# EAGLE board fabTinyStar-013 (EAGLE 6.5.0)
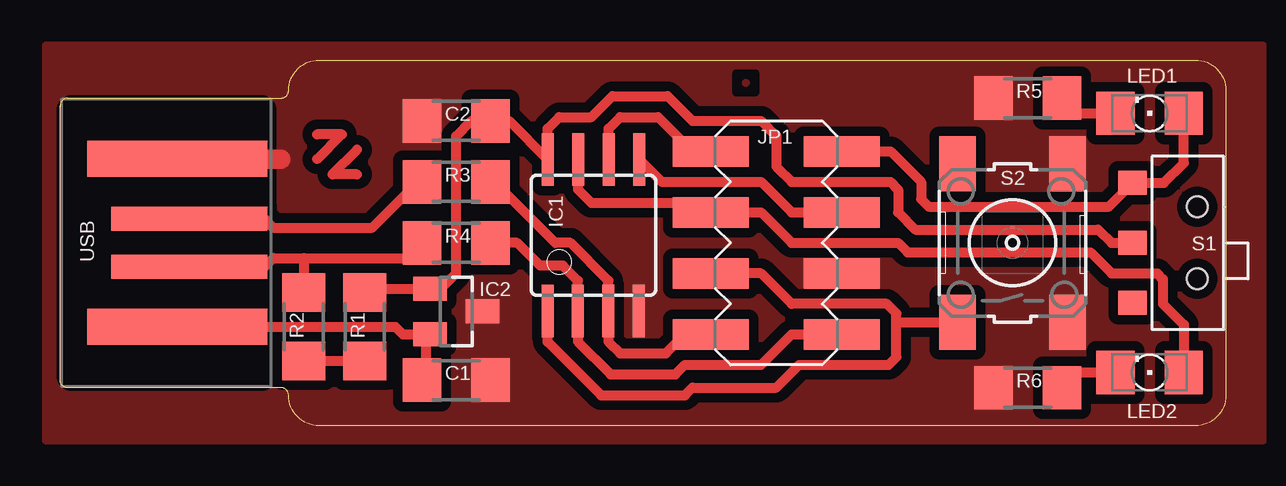
[diagram p0: board, top side]
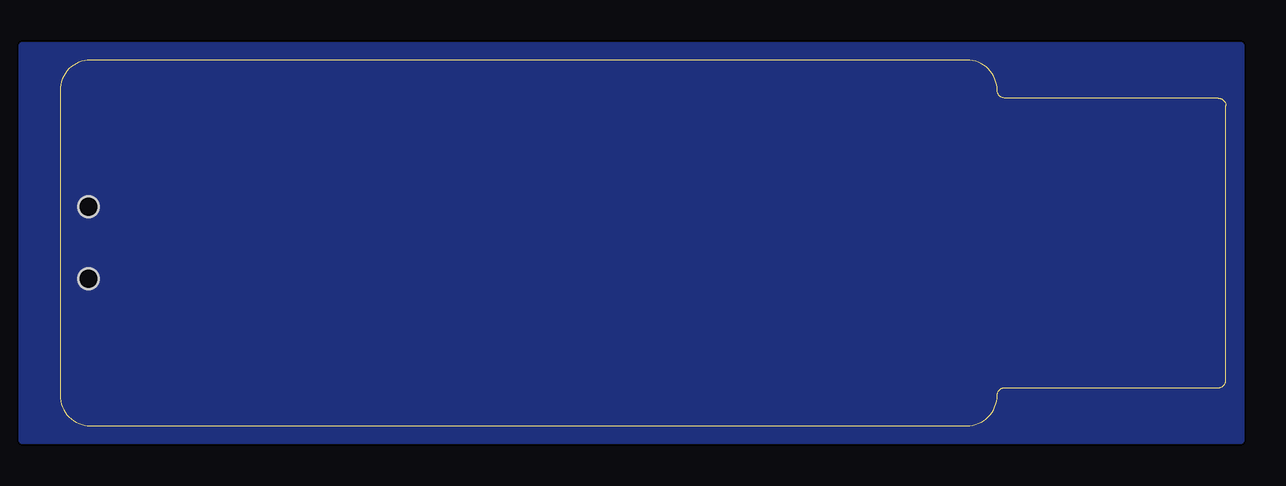
[diagram p1: board, bottom side, seen from below]

Size 48.58 x 15.24 mm. Coordinates in mm from the lower left corner, seen from the top.
Outline: 9.21,13.65 arc90 9.53,13.97 arc-90 10.79,15.24 47.31,15.24 arc-90 48.58,13.97 48.58,1.27 arc-90 47.31,0 10.79,0 arc-90 9.53,1.27 arc90 9.21,1.59 0.32,1.59 arc-90 0,1.91 0,13.34 arc-90 0.32,13.65 9.21,13.65
Copper layers (1*16): Top 0.035mm / dielectric 1.5mm / Bottom 0.035mm
Design rules "default *": minimum track width 10mil, minimum drill 24mil, track to track 16mil, track to pad 16mil, pad to pad 16mil, via to via 16mil, smd to smd 8mil, copper to edge 0mil, drill to drill 8mil, minimum pad ring 10mil, minimum via ring 8mil, stop-mask expansion 4mil, vias tented up to drill 0mil, thermal gap 10mil
tRestrict: area 0.5,2.1 to 8.4,13.2

## Footprints (pad centres in the part's own frame; a part is rotated, then mirrored left to right if it is on the bottom)
1206 = smd 1.6 x 1.803: 1 -1.422,0; 2 1.422,0
SOIC8 = smd 0.5 x 2.2: 1 -1.905,-3.154; 2 -0.645,-3.154; 3 0.625,-3.154; 4 1.895,-3.154; 5 1.905,3.154; 6 0.635,3.154; 7 -0.635,3.154; 8 -1.905,3.154
SOT23 = smd 1 x 1.4: 1 -0.95,-1.1; 2 0.95,-1.1; 3 0,1.1
54202-G0808LF = smd 1.27 x 3.175: 1 -3.81,-2.731; 2 -3.81,2.731; 3 -1.27,-2.731; 4 -1.27,2.731; 5 1.27,-2.731; 6 1.27,2.731; 7 3.81,-2.731; 8 3.81,2.731
1206' = smd 1.6 x 1.803: A -1.422,0; C 1.422,0
AYZ0102AGRLC = smd 1 x 1.2: 1 2.5,-2.3; 2 0,-2.3; 3 -2.5,-2.3 | hole 0.85: -1.5,0.4; 1.5,0.4
6MM_SWITCH = smd 2.286 x 1.524: 1 -3.302,2.286; 2 3.302,2.286; 3 -3.302,-2.286; 4 3.302,-2.286
USB-A-PCB = smd 7.5 x 1.5: 5V -0.2,-3.5; GND -0.2,3.5 | smd 6.5 x 1: USB_M 0.3,-1; USB_P 0.3,1

## Placement (x,y rotation side)
C1  10uF  [1206]  16.51,1.91 0 top
C2  100nF  [1206]  16.51,12.7 0 top
IC1  ATTINY*5  [SOIC8]  22.23,7.94 0 top
IC2  3v3  [SOT23]  16.51,4.76 270 top
JP1  PINHD-2X04  [54202-G0808LF]  29.84,7.62 270 top
LED1  red  [1206']  45.4,13.02 180 top
LED2  green  [1206']  45.4,2.22 180 top
R1  1K  [1206]  12.7,4.13 270 top
R2  499  [1206]  10.16,4.13 270 top
R3  49  [1206]  16.51,10.16 0 top
R4  49  [1206]  16.51,7.62 0 top
R5  1K  [1206]  40.32,13.65 180 top
R6  499  [1206]  40.32,1.59 180 top
S1  SLIDE-SWITCH  [AYZ0102AGRLC]  46.99,7.62 270 top
S2  [6MM_SWITCH]  39.69,7.62 90 top
USB  USBPCB  [USB-A-PCB]  5.08,7.62 0 top

## Library data of the parts
C1 C2 R1-R6 = 01_FAB_Hello
IC1 IC2 S2 = 01_fab
JP1 S1 = Zaerc
LED1 LED2 = led
USB = SparkFun

## Nets
5V: C1.1 IC2.2 USB.5V
B3: IC1.2 JP1.8 R4.2
B4: IC1.3 JP1.7 R3.2
D+: R3.1 USB.USB_P
D-: R2.1 R4.1 USB.USB_M
GND: C1.2 C2.1 IC1.4 IC2.3 JP1.6 R5.2 R6.2 S2.3 S2.4 USB.GND
MISO: IC1.6 JP1.1
MOSI: IC1.5 JP1.4
N$1: R1.2 R2.2
N$13: LED2.C R6.1
N$14: LED1.C R5.1
RESET: IC1.1 JP1.5 S2.1
SCK: IC1.7 JP1.3 LED2.A
TP: JP1.2 LED1.A S1.3
VCC: C2.2 IC1.8 IC2.1 R1.1 S1.2

## Tracks (layer width: path | path; a pad name or v marks a point on that pad's centre or on a via)
5V
  Top 0.406: USB.5V 13.98,4.12 14.29,3.81 IC2.2 15.24,3.64 15.24,2.06 C1.1
B3
  Top 0.406: R4.2 19.05,7.62 20,6.67 20.95,6.67 21.58,6.04 IC1.2 21.58,3.5 22.94,2.14 25.64,2.14 26.04,2.54 29.21,2.54 30.48,3.81 JP1.8
B4
  Top 0.406: R3.2 18.1,10.16 20.64,7.62 21.27,7.62 22.85,6.04 IC1.3 22.85,3.5 23.34,3.02 25.24,3.02 26.04,3.81 JP1.7
D+
  Top 0.406: USB.USB_P 8.53,8.62 8.89,8.26 13.02,8.26 14.92,10.16 R3.1
D-
  Top 0.406: USB.USB_M 8.53,6.62 8.89,6.99 10.16,6.99 | 10.16,6.99 R2.1 | 10.16,6.99 14.45,6.99 R4.1
GND
  Top 0.813: 9.21,11.11 USB.GND
  pour Top (isolate 0.406, rank 6, no thermals): -0.64,-0.64 50.16,-0.64 50.16,15.88 -0.64,15.88
MISO
  Top 0.406: IC1.6 22.86,12.38 23.34,12.86 24.92,12.86 26.35,11.43 JP1.1
MOSI
  Top 0.406: IC1.5 24.15,11.09 25.08,10.16 29.21,10.16 30.48,8.89 JP1.4
N$1
  Top 0.406: R2.2 R1.2
N$2
  pour Bottom: -0.64,-0.64 50.16,-0.64 50.16,15.88 -0.64,15.88
N$3
  pour Top: 28.57,14.13 28.58,14.13 arc90 28.73,14.29 arc90 28.57,14.45 arc90 28.42,14.29 28.42,14.29 arc90
N$13
  Top 0.406: LED2.C 42.38,2.22 R6.1
N$14
  Top 0.406: LED1.C 42.38,13.02 R5.1
N$33
  Top 0.406: 10.72,12.14 11.75,12.14 10.72,11.11
N$34
  Top 0.406: 12.38,11.51 11.35,10.48 12.38,10.48
RESET
  Top 0.406: IC1.1 20.32,3.49 22.54,1.27 26.04,1.27 26.35,1.59 29.84,1.59 30.8,2.54 34.53,2.54 34.85,2.86 34.85,4.29 | 34.85,4.29 34.85,4.68 34.45,5.08 30.48,5.08 29.21,6.35 JP1.5 | S2.1 34.88,4.32 34.85,4.29
SCK
  Top 0.406: IC1.7 21.59,9.84 22.15,9.29 26.72,9.29 JP1.3 29.21,8.89 30.48,7.62 34.92,7.62 35.32,7.22 42.94,7.22 43.81,6.35 45.72,6.35 45.96,6.11 45.96,5.08 46.83,4.21 LED2.A
TP
  Top 0.406: JP1.2 34.61,11.43 35.88,10.16 35.88,9.45 36.2,9.13 43.7,9.13 S1.3 46,10.12 46.83,10.95 LED1.A
VCC
  Top 0.406: S1.2 43.81,7.62 43.26,8.18 35.64,8.18 34.92,8.89 34.92,9.84 34.61,10.16 30.48,10.16 29.84,10.79 29.84,12.06 29.21,12.7 26.35,12.7 25.32,13.73 23.02,13.73 22.15,12.86 20.8,12.86 20.32,12.38 IC1.8 18.71,12.7 C2.2 17.14,12.7 16.51,12.06 16.51,6.35 15.87,5.71 IC2.1 12.86,5.71 R1.1

## Text on the board
tDocu: FabTiny* v0.3.3 | CC BY-NC-SA 4.0